# Altium PCB 0.96OLED_SSD1315.PcbDoc
Units mil, origin at the board's own origin, x right, y up, seen from the top; angles counter-clockwise.
Board outline 1062.99 x 1142 mil, 2 copper layers (Top Layer, Bottom Layer); 17 components, 14 nets, 66 pads, 12 vias.
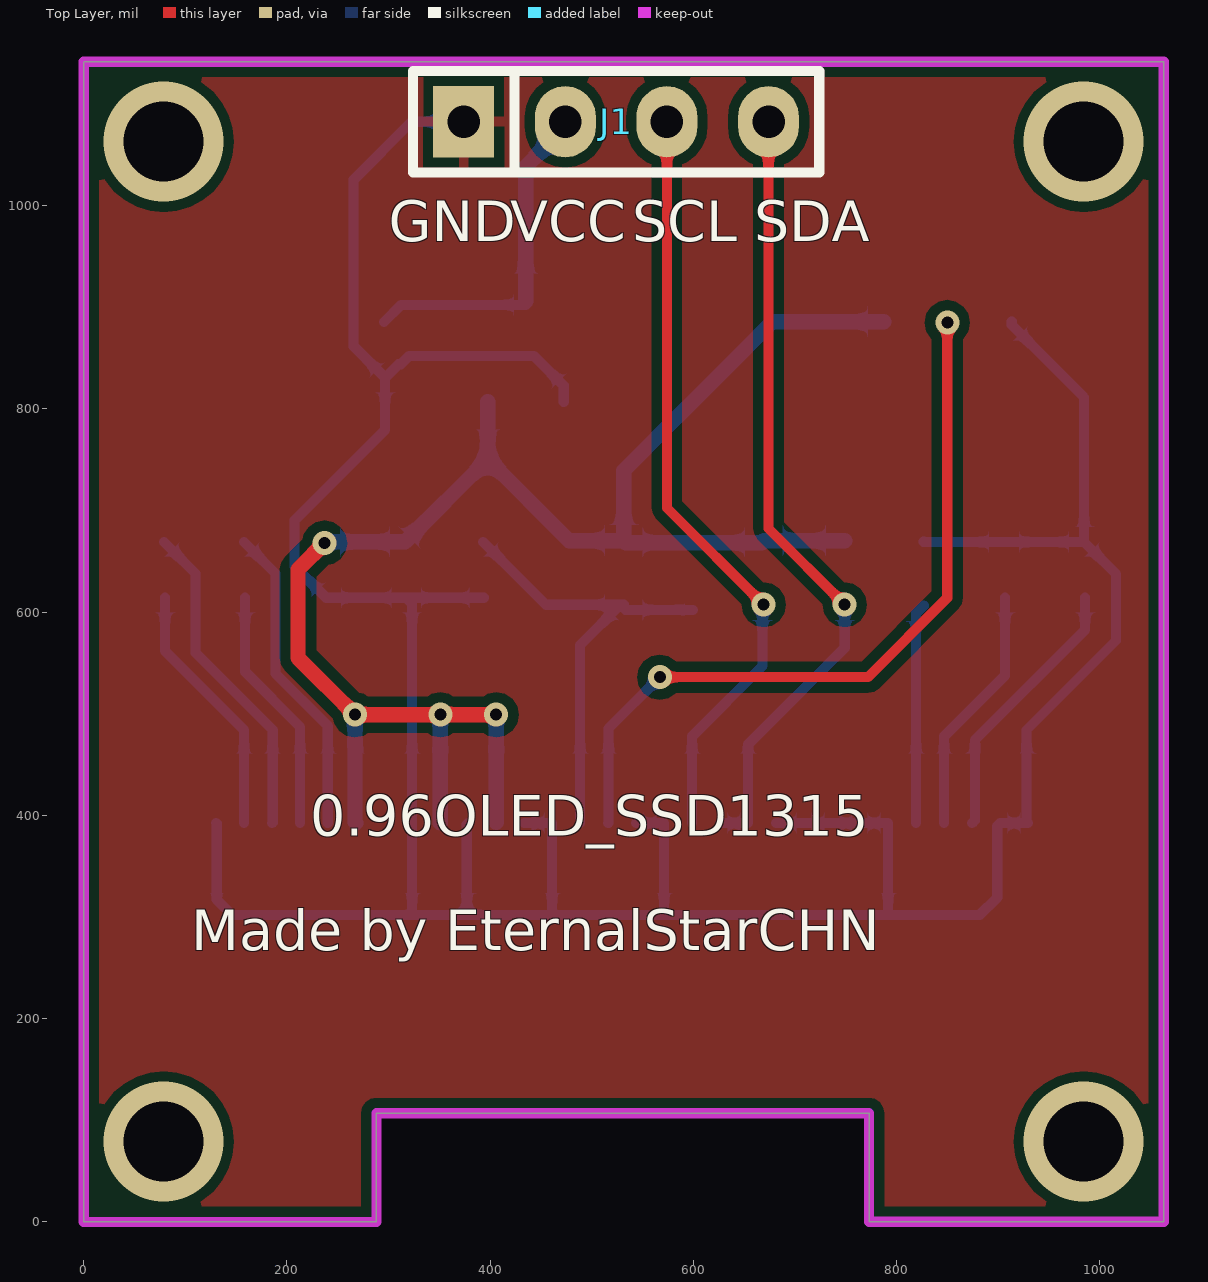
[diagram p0: Top Layer view]
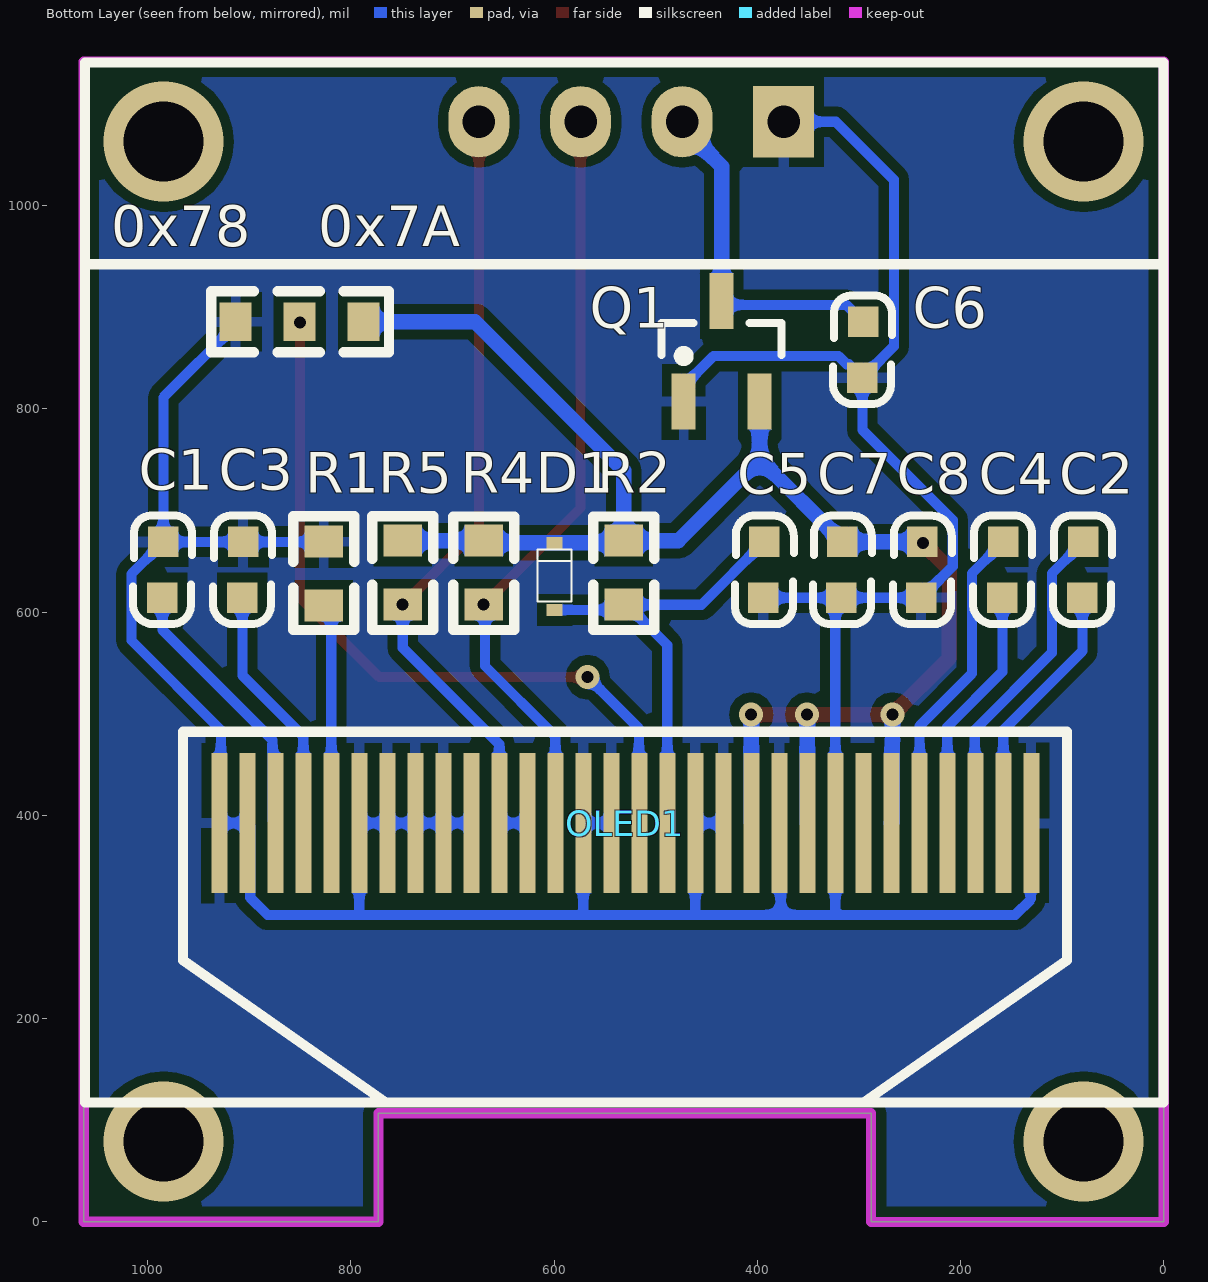
[diagram p1: Bottom Layer view, seen from below]
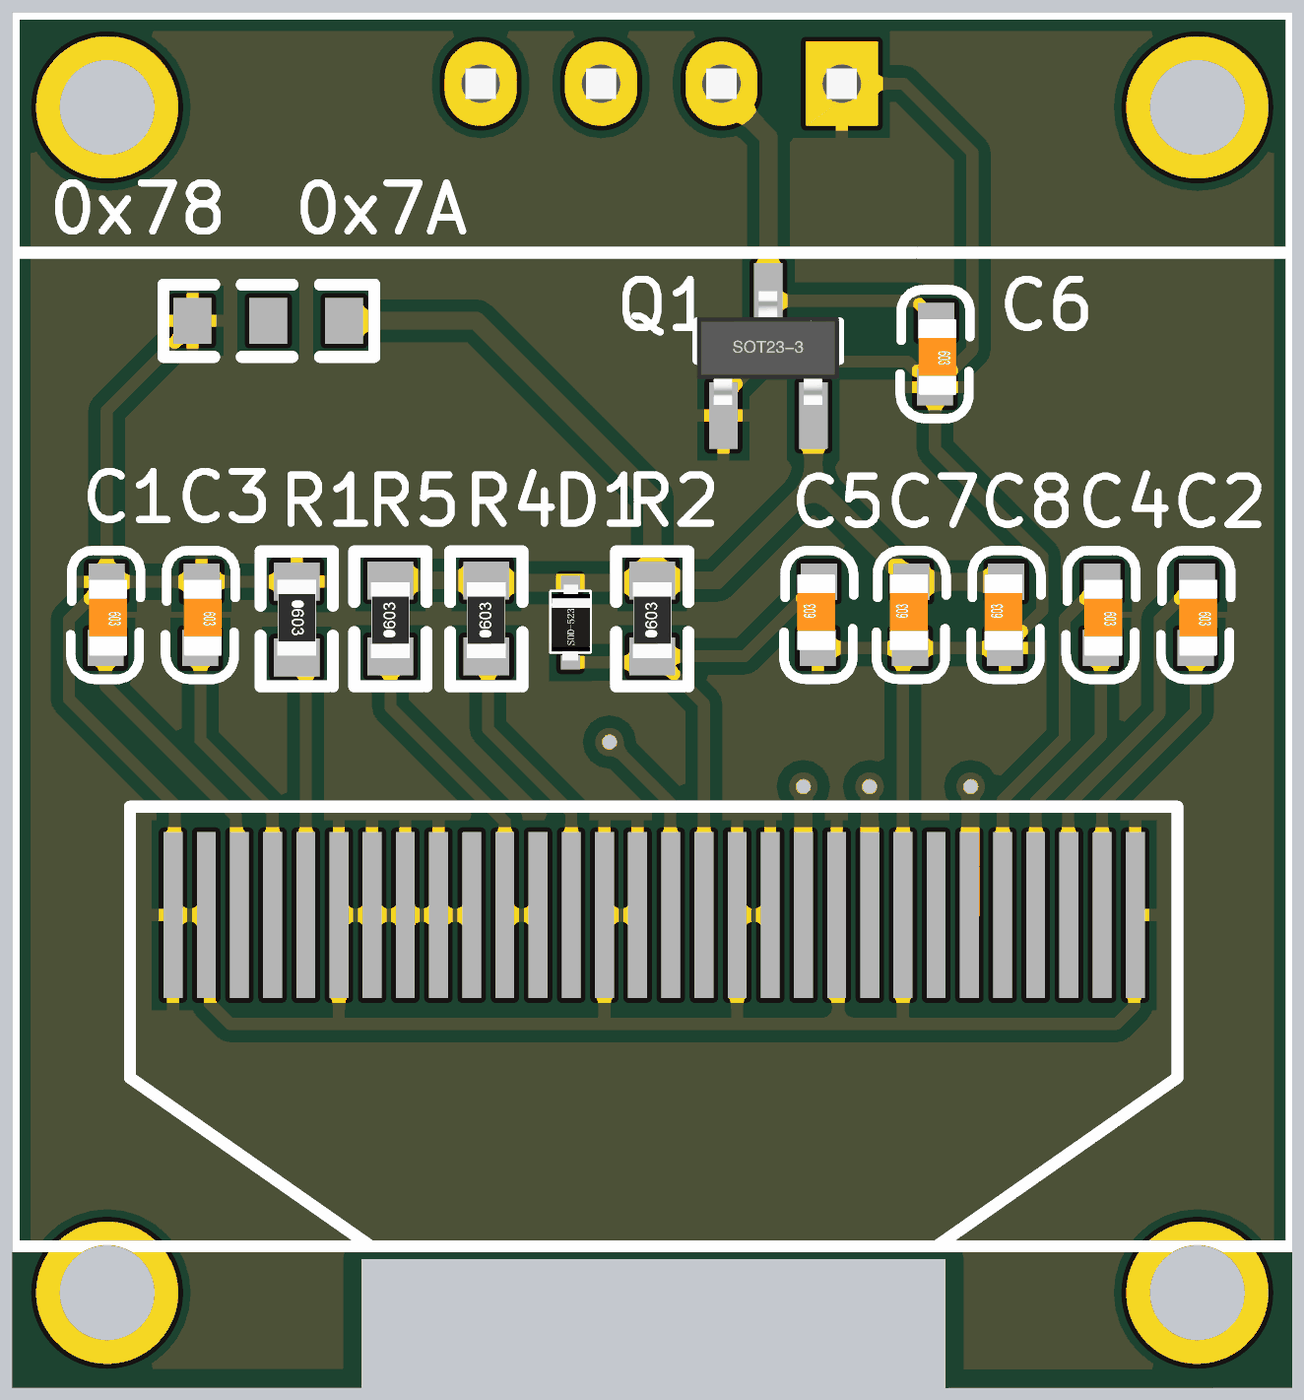
[diagram p2: 3D render of the assembled board from below, using the file's embedded part models]

## Layer stack, top to bottom
Top Solder: solder mask 0.4, Solder Resist, Dk 3.5
Top Layer: signal copper 1.4
Dielectric 1: dielectric 12.6, FR-4, Dk 4.8
Bottom Layer: signal copper 1.4
Bottom Solder: solder mask 0.4, Solder Resist, Dk 3.5

## Board outline
0,0 0,1141.73 1062.99,1141.73 1062.99,0 773,0 773,106.73 288,106.73 288,-0.27

## Design rules (kind name [scope] priority, off if disabled: settings)
Clearance [All] p1: gap=10 ignorepadtopadclearanceinfootprint=FALSE except(0: Arc-Hole Track-Hole SMDPad-Hole THPad-Hole Via-Hole Fill-Hole Poly-Hole Region-Hole Text-Hole)
ComponentClearance ComponentClearance_1 [InComponent('OLED1')] p1: gap=0 collisioncheckmode=3 verticalgap=0 showdistances=FALSE
ComponentClearance [All] p2: gap=10 collisioncheckmode=3 verticalgap=10 showdistances=FALSE
MinimumSolderMaskSliver [All] p1: minsoldermaskwidth=0
PolygonConnect [All] p1: connectstyle=Relief reliefconductorwidth=10 reliefentries=4 polygonreliefangle="90 Angle" airgapwidth=10
RoutingVias [All] p1: holewidth=28 width=50 viastyle="Through Hole" minholewidth=11.81 minwidth=19.68 maxholewidth=248.03 maxwidth=248.03
SilkToSilkClearance [All] p1: silktosilkclearance=0
SilkToSolderMaskClearance [IsPad] p1: minsilkscreentomaskgap=0 clearancetoexposedcopper=TRUE
SolderMaskExpansion [All] p1: expansion=4
Width [All] p1: maxlimit=20 minlimit=3.5 preferedwidth=10
26 further rules are at their usual default settings.

## Components (designator, comment, footprint, x,y, rotation, side; value= is the part's Value field where it differs from the comment)
0x78 "4.7K/4.7K" SW_0603R 787.4,885.83 r0 bottom (schematic designator R3)
C1 "2.2uF/0603" 0603C 984.25,669.29 r270 bottom
C2 "1uF/0603" 0603C 78.74,669.29 r270 bottom
C3 "4.7uF/0603" 0603C 905.51,669.29 r270 bottom
C4 "1uF/0603" 0603C 157.48,669.29 r270 bottom
C5 "4.7uF/0603" 0603C 394.41,613.94 r90 bottom
C6 "1uF/0603" 0603C 295.28,885.83 r270 bottom
C7 "1uF/0603" 0603C 317.67,613.94 r90 bottom
C8 "1uF/0603" 0603C 238.93,613.93 r90 bottom
D1 "IN4148" SOD-523 616.14,610.24 r90 bottom
J1 "Pin HDR1X4" "Pin HDR1X4/2.54mm-S" 374.02,1082.68 r90 top
OLED1 "0.96OLED_SSD1315" OLED_0.96 130.32,392.32 r0 bottom locked
Q1 "662K/SOT23" SOT23 472.44,807.09 r180 bottom
R1 "620K/0603" 0603R 826.77,669.29 r270 bottom
R2 "4.7K/0603" 0603R 531.5,607.28 r90 bottom
R4 "4.7K/0603" 0603R 669.29,607.28 r90 bottom
R5 "4.7K/0603" 0603R 749,607.29 r90 bottom

## Footprints (in the part's own frame and the unit in brackets; to place one, negate y for a bottom-side part, rotate by r counter-clockwise, add the part's x,y. Pads: shape width x height; smd on the part's side, far side on the other; paste and mask are expansions set on the pad)
0603C [mil]
  rect 30x30 smd: 1(0.21,-0.35) 2(55.21,-1.35)
  silkscreen extent -26,-30 81,28, body extent -1,-15 62,16, height 12
0603R [mm]
  rect 0.8x0.965 smd: 1(0,0) 2(1.6,0)
  silkscreen extent -0.64,-0.76 2.21,0.76, body extent -0.04,-0.41 1.56,0.41, height 0.45
OLED_0.96 [mm]
  rect 0.4x3.5 smd: 1(0,0) 2(0.7,0) 3(1.4,0) 4(2.1,0) 5(2.8,0) 6(3.5,0) 7(4.2,0) 8(4.9,0) 9(5.6,0) 10(6.3,0) 11(7,0) 12(7.7,0) 13(8.4,0) 14(9.1,0) 15(9.8,0) 16(10.5,0) 17(11.2,0) 18(11.9,0) 19(12.6,0) 20(13.3,0) 21(14,0) 22(14.7,0) 23(15.4,0) 24(16.1,0) 25(16.8,0) 26(17.5,0) 27(18.2,0) 28(18.9,0) 29(19.6,0) 30(20.3,0)
  silkscreen extent -3.3,-19.01 23.66,6.98
"Pin HDR1X4/2.54mm-S" [mil]
  rect 70x60 hole 32: 1(0,0)
  oval 70x60 hole 32: 2(0,-100) 3(0,-200) 4(0,-300)
  silkscreen extent -50,-350 50,50, body extent -50,-350 50,50, height 336
SOD-523 [mm] "塑封二极管"
  rect 0.3x0.4 smd: A(-0.203,-0.425) K(1.473,-0.425)
  silkscreen extent 0,-0.85 1.3,0, body extent -0.16,-0.83 1.44,-0.03, height 0.65
SOT23 [mm]
  rect 0.6x1.4 smd: 1(0,0) 2(1.9,0) 3(0.95,2.514)
  silkscreen extent -0.55,1.02 2.45,1.97, body extent -0.56,0.22 2.44,2.62, height 1.05
SW_0603R [mm]
  rect 0.8x0.965 smd: 1(0,0) 2(1.6,0) 3(3.2,0)
  silkscreen extent -0.64,-0.76 3.81,0.76

## Part data
0x78: library part RES_SW
C1 C2 C3 C4 C5 C6 C7 C8: library part CAP, "无极性电容"
D1: library part DIODE, "普通二极管"
Q1: library part LDO_SOT23, "SOT23封装LDO"
R1 R2 R4 R5: library part RES

## Via types
v1: diameter 23.62, hole 11.81, Top Layer to Bottom Layer, 8 vias
v2: diameter 118.11, hole 78.74, Top Layer to Bottom Layer, 4 vias

## Nets (pads, with @x,y where several pads share a name; then routed paths per layer and width w, separated by ;. In a path a pad name is that pad's centre, name@x,y a point inside that pad or via, vN(x,y) a via of type N, cw(c..) or ccw(c..) an arc to the next point about the centre after c; other vN are vias at no path point)
GND: 0x78.3 C1.1 C3.1 C5.1 C6.2 C7.1 C8.1 J1.1 OLED1.1 OLED1.8 OLED1.10 OLED1.12 OLED1.13 OLED1.16 OLED1.17 OLED1.21 OLED1.22 OLED1.23 OLED1.24 OLED1.25 OLED1.29 OLED1.30 Q1.1 R1.1 | length 3510.9
  Bottom Layer w10: OLED1.1 131,391.64 131,317 146,302 319,302 ; J1.1 322.68,1082.68 265.63,1025.63 265.63,861.61 C6.2 ; OLED1.10@378.19,392.48 OLED1.10 377,390.98 377,302 ; C5.1 C7.1 ; OLED1.12 OLED1.13 461.02,304.98 464,302 ; Q1.1 472.44,822.83 443.28,852 320,852 312,844 310.02,844 C6.2 ; OLED1.16 OLED1.17 571.26,305.74 575,302 ; OLED1.21 OLED1.22 OLED1.23 OLED1.24 OLED1.25 791.73,302.73 791,302 ; R1.1 826.98,669.08 C3.1 C1.1 ; 0x78.3 913.39,882.58 984.61,811.36 C1.1 ; C6.2 296.63,779.41 207.57,690.36 207.57,645.14 C8.1 C7.1 ; C7.1 323.23,608.24 OLED1.8 323.23,306.23 319,302 ; 319,302 377,302 ; 377,302 464,302 ; 464,302 575,302 ; 575,302 791,302 ; 791,302 882.07,302 899.09,319.02 899.09,389.45 OLED1.29 OLED1.30 928,393.85 928,484 1016,572 1016,637.69 C1.1
NetC1_2: C1.2 OLED1.28 | length 267.8
  Bottom Layer w10: OLED1.28 877.28,395.2 877.28,474.28 985.61,582.61 C1.2
NetC2_1: C2.1 OLED1.3 | length 321.3
  Bottom Layer w10: C2.1 110.09,638.08 110.09,559.91 186,484 186,392.89 OLED1.3
NetC2_2: C2.2 OLED1.2 | length 254
  Bottom Layer w10: C2.2 80.09,561.62 157.87,483.84 OLED1.2
NetC3_2: C3.2 OLED1.27 | length 246.6
  Bottom Layer w10: OLED1.27 846.85,477.85 906.87,537.87 C3.2
NetC4_1: C4.1 OLED1.5 | length 311
  Bottom Layer w10: C4.1 188.83,638.08 188.83,539.45 240.24,488.04 240.24,392.63 OLED1.5
NetC4_2: C4.2 OLED1.4 | length 244.2
  Bottom Layer w10: C4.2 158.83,541.17 212.99,487.01 OLED1.4
NetC5_2: C5.2 D1.A OLED1.14 R2.1 | length 466.4
  Bottom Layer w10: C5.2 454.92,607.28 R2.1@528.25,607.28 ; OLED1.14 488.58,567.62 R2.1@528.25,607.28 ; R2.1@529.87,605.66 533.3,602.24 D1.A ; R2.1 R2.1@528.25,607.28
NetOLED1_15: 0x78.2 OLED1.15 | length 751.1
  Top Layer w10: v1(567,536) 772,536 850,614 v1(850,885)
  Bottom Layer w10: OLED1.15 516.57,392.75 516.57,485.57 v1(567,536)
NetOLED1_26: OLED1.26 R1.2 | length 217.1
  Bottom Layer w10: OLED1.26 819.29,598.82 R1.2
SCL(D0): J1.3 OLED1.18 R4.1 | length 759
  Top Layer w10: J1.3 574.02,702.56 v1(669.29,607.28)
  Bottom Layer w10: OLED1.18 598.82,477.82 668,547 668,605.99 v1(669.29,607.28)
SDA(D1): J1.4 OLED1.19 OLED1.20 R5.1 | length 788.3
  Top Layer w10: J1.4 674.02,682.28 v1(749,607.29)
  Bottom Layer w10: OLED1.19 OLED1.20 653.94,469.94 749,565 v1(749,607.29)
VCC: 0x78.1 C7.2 C8.2 D1.K OLED1.6 OLED1.9 OLED1.11 Q1.2 R2.2 R4.2 R5.2 | length 1685.4
  Top Layer w15: v1(237,668) 211,642 211,555.02 v1(267,499.02) v1(351,499.02) v1(406,499.02)
  Bottom Layer w10: OLED1.9 OLED1.9@350.89,392.43 ; v1@350.89,498.91 v1(351,499.02) ; OLED1.11 405.45,392.78 OLED1.11@405.95,393.28 ; v1@405.95,498.97 v1(406,499.02)
  Bottom Layer w15: C8.2 C7.2 397.64,750.47 ; v1(267,499.02) 267,393.43 OLED1.6 ; OLED1.9@350.89,392.43 v1@350.89,498.91 ; Q1.2 397.64,750.47 ; OLED1.11@405.95,393.28 v1@405.95,498.97 ; R5.2 669.3,670.28 667.25,668.24 D1.K 533.54,668.24 R2.2 ; 0x78.1 677.83,885.83 531.5,739.5 R2.2 ; 397.64,750.47 477.83,670.28 R2.2
VCC_IN: C6.1 J1.2 Q1.3 | length 342.8
  Bottom Layer w10: C6.1 312.44,902.43 435.03,902.43 Q1.3
  Bottom Layer w15: Q1.3 435.03,1038.7 474.02,1077.68 J1.2
pads on no net: OLED1.7
copper on no net:
  other v2: 78.74,78.74 984.25,78.74 78.74,1062.99 984.25,1062.99

## Polygon pours and split planes (outlines as drawn)
GND on Top Layer "Top Layer-No Net" (solid, pour order 4): 0,0 0,1141.73 1062.99,1141.73 1062.99,0 773,0 773,106.73 288,106.73 288,-0.27
GND on Bottom Layer "Top Layer-No Net1" (solid, pour order 5): 0,0 0,1141.73 1062.99,1141.73 1062.99,0 773,0 773,106.73 288,106.73 288,-0.27

## Keep-outs
Keep-Out Layer:
  the board outline again, w10

## Silkscreen, mask and mechanical layers (free items; w line width, h text height)
Top Overlay:
  text "GND" at 300,965 h40
  text "VCC" at 420,965 h40
  text "SCL" at 540,965 h40
  text "SDA" at 660,965 h40
  text "0.96OLED_SSD1315" at 223,380 h40
  text "Made by EternalStarCHN" at 106,267 h40
Bottom Overlay:
  text "0x7A" at 832,960 h40